# Altium PCB dctodcisole.PcbDoc
Units mm, origin at the board's own origin, x right, y up, seen from the top; angles counter-clockwise.
Board outline 11.8 x 15.4 mm, 2 copper layers (Top Layer, Bottom Layer); 10 components, 6 nets, 22 pads, 0 vias.
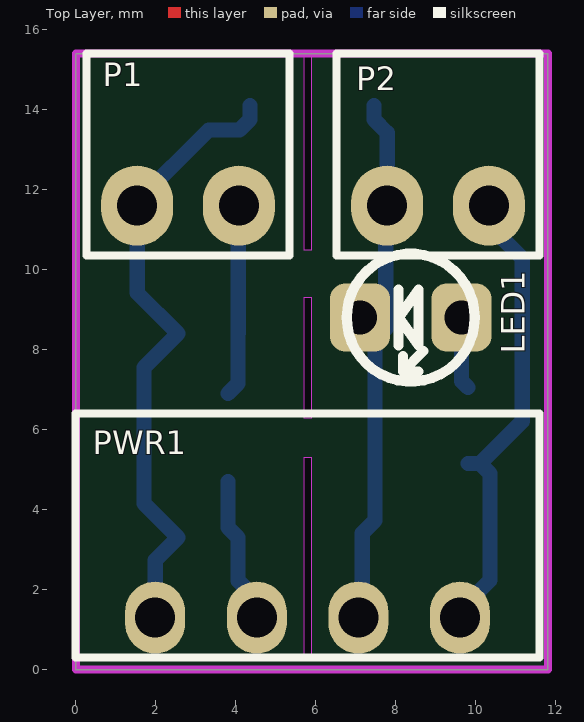
[diagram p0: Top Layer view]
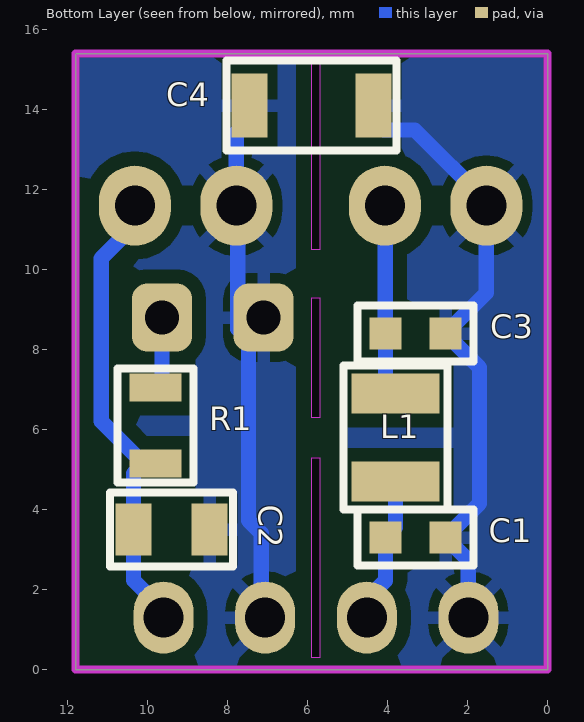
[diagram p1: Bottom Layer view, seen from below]

## Layer stack, top to bottom
Top Solder: solder mask 0.0102, Solder Resist, Dk 3.5
Top Layer: signal copper 0.0356
Dielectric 1: dielectric 0.32, FR-4, Dk 4.8
Bottom Layer: signal copper 0.0356
Bottom Solder: solder mask 0.0102, Solder Resist, Dk 3.5

## Board outline
0,0 0,15.4 11.8,15.4 11.8,0
cut-out: 5.9,15.4 5.7,15.4 5.7,10.5 5.9,10.5
cut-out: 5.9,9.3 5.7,9.3 5.7,6.3 5.9,6.3
cut-out: 5.7,0.3 5.9,0.3 5.9,5.3 5.7,5.3

## Design rules (kind name [scope] priority, off if disabled: settings)
Clearance [All -Keepout vs All-Keepout] p1: gap=0.35 ignorepadtopadclearanceinfootprint=FALSE
MinimumAnnularRing [All] p1: minimumring=0.2
PolygonConnect [All] p1: connectstyle=Relief reliefconductorwidth=0.3 reliefentries=4 polygonreliefangle="90 Angle" conductorbypadedge=TRUE mindistance=0.381 enablemindistance=TRUE airgapwidth=0.254
RoutingLayers [All] p1: top layer_v5=FALSE bottom layer_v5=TRUE
RoutingVias [All] p1: holewidth=0.711 width=1.27 viastyle="Through Hole" minholewidth=0.711 minwidth=1.27 maxholewidth=0.711 maxwidth=1.27
SolderMaskExpansion [All] p1: expansion=0.102 istentingtop=FALSE
SupplyNets "Schematic Supply Nets_3" [InNet('+5Vpwr')] p1: voltage=0.000
SupplyNets "Schematic Supply Nets_2" [InNet('DIGITAL_GND')] p2: voltage=0.000
SupplyNets "Schematic Supply Nets_1" [InNet('GND')] p3: voltage=0.000
SupplyNets "Schematic Supply Nets" [InNet('+5Vdigital')] p4: voltage=0.000
UnRoutedNet [All] p1: checkbadconnections=TRUE
Width [All] p1: maxlimit=2 minlimit=0.254 preferedwidth=0.3 toplayer_maxwidth=0.254 toplayer_prefwidth=0.254 minimp=50.000000 maximp=50.000000 favimp=50.000000
28 further rules are at their usual default settings.

## Components (designator, comment, footprint, x,y, rotation, side; value= is the part's Value field where it differs from the comment)
C1 "4.7uF/35V/0603" "cap 0603" 3.3,3.3 r180 bottom
C2 "10uF/25V/0805" "CAP 0805" 9.4,3.5 r180 bottom
C3 "4.7uF/35V/0603" "cap 0603" 3.3,8.4 r180 bottom
C4 "1nF/2kV/1206" "CAP 1206" 5.9,14.1 r0 bottom
L1 "6.8uH/1.7A" "1008(2520 metric)" 3.8,5.8 r270 bottom
LED1 "LED 3mm/Green" "LED 3MM" 8.395,8.825 r180 top
P1 "XH2PIN" "PIN-HEADER 2*1" 2.8,11.6 r0 top
P2 "XH2PIN" "PIN-HEADER 2*1" 9.05,11.6 r0 top
PWR1 "B0505S-1WR3" B0505S 5.79,1.3 r0 top
R1 "560R/0805" "RES 0805" 9.8,6.1 r270 bottom

## Footprints (in the part's own frame and the unit in brackets; to place one, negate y for a bottom-side part, rotate by r counter-clockwise, add the part's x,y. Pads: shape width x height; smd on the part's side, far side on the other; paste and mask are expansions set on the pad)
"1008(2520 metric)" [mm]
  rect 1x2.2 smd: 1(-1.1,0) 2(1.1,0)
  silkscreen extent -1.8,-1.3 1.8,1.3, body extent -1.25,-1.03 1.25,1.03, height 1.23
B0505S [mm]
  oval 1.5x1.8 hole 1: 1(-3.81,0) 2(-1.27,0) 3(1.27,0) 4(3.81,0)
  silkscreen extent -5.8,-1 5.8,5.1, body extent -5.8,-0.9 5.8,5.1, height 10.16
"cap 0603" [mm]
  rect 0.8x0.8 smd: 1(-0.75,0) 2(0.75,0)
  silkscreen extent -1.45,-0.7 1.45,0.7, body extent -0.8,-0.4 0.8,0.4, height 0.8
"CAP 0805" [mm]
  rect 0.9x1.3 smd: 1(-0.95,0) 2(0.95,0)
  silkscreen extent -1.54,-0.92 1.54,0.92, body extent -1,-0.63 1,0.63, height 1
"CAP 1206" [mm]
  rect 0.9x1.6 smd: 1(-1.55,0) 2(1.55,0)
  silkscreen extent -2.12,-1.12 2.12,1.12, body extent -1.6,-0.8 1.6,0.8, height 0.94
"LED 3MM" [mm]
  rrect50% 1.5x1.7 hole 0.85 mask+0.1: 1(-1.245,0.025) 2(1.295,0.025)
  silkscreen extent -1.57,-1.57 1.63,1.62, body extent -1.72,-1.73 1.78,1.77, height 3.9
"PIN-HEADER 2*1" [mm]
  oval 1.8x2 hole 1: 1(-1.27,0) 2(1.27,0)
  silkscreen extent -2.54,-1.25 2.54,3.8, body extent -2.54,-0.4 2.54,9.73, height 2.51
"RES 0805" [mm]
  rect 0.7x1.3 smd mask+0.051: 1(-0.95,0) 2(0.95,0)
  silkscreen extent -1.43,-0.95 1.43,0.95, body extent -1,-0.63 1,0.63, height 0.5

## Part data
C1 C2 C3 C4: library part Capacitor, "Capacitor"
L1: library part Inductor, "Inductor"
LED1: library part LED, "Typical LED", COLOR=Green
P1 P2: library part "Header 2H", "RELAY", LatestRevisionDate=17-Jul-2002, LatestRevisionNote="Re-released for DXP Platform.", Publisher="Altium Limited"
R1: library part Res

## Nets (pads, with @x,y where several pads share a name; then routed paths per layer and width w, separated by ;. In a path a pad name is that pad's centre, name@x,y a point inside that pad or via, vN(x,y) a via of type N, cw(c..) or ccw(c..) an arc to the next point about the centre after c; other vN are vias at no path point)
+5Vdigital: C3.1 L1.1 P1.2 | length 4.8
  Bottom Layer w0.381: L1.1 4.05,7.15 C3.1 4.06,8.41 4.06,11.59 P1.2
+5Vpwr: C2.1 P2.2 PWR1.4 R1.2 | length 11.8
  Bottom Layer w0.381: PWR1.4 9.6,1.483 10.35,2.233 10.35,4.9 R1.2@10.1,5.15 ; R1.2 R1.2@10.1,5.15 ; P2.2 10.32,11.116 11.16,10.277 11.16,6.209 R1.2@10.1,5.15
DIGITAL_GND: C1.2 C3.2 C4.1 P1.1 PWR1.1 | length 15.8
  Bottom Layer w0.381: PWR1.1 1.98,2.73 C1.2 1.7,4.15 1.7,7.55 C3.2 1.53,9.42 P1.1 1.53,11.7 3.32,13.49 4.09,13.49 4.35,13.75 C4.1
GND: C2.2 C4.2 LED1.2 P2.1 PWR1.3 | length 13.2
  Bottom Layer w0.381: PWR1.3 7.155,1.395 7.155,3.405 7.25,3.5 7.477,3.728 7.477,8.247 7.705,8.475 7.742,8.512 7.742,11.562 P2.1 7.78,13.42 7.45,13.75 C4.2
NetC1_1: C1.1 L1.2 PWR1.2 | length 3.7
  Bottom Layer w0.381: L1.2 3.8,3.55 C1.1 4.05,2.223 4.52,1.753 PWR1.2
NetLED1_1: LED1.1 R1.1 | length 1.8
  Bottom Layer w0.381: LED1.1 9.64,7.21 R1.1

## Polygon pours and split planes (outlines as drawn)
GND on Bottom Layer "GND_L02_P001" (solid, remove dead copper, pour order 1): 6.3,15.4 11.8,15.4 11.8,0 6.3,0
DIGITAL_GND on Bottom Layer "DIGITAL_GND_L02_P000" (solid, remove dead copper, pour order 0): 0,0 5,0 5,15.4 0,15.4

## Keep-outs
Keep-Out Layer:
  the board outline again, w0.2